# EAGLE board vcf-v2 (EAGLE 9.3.1)
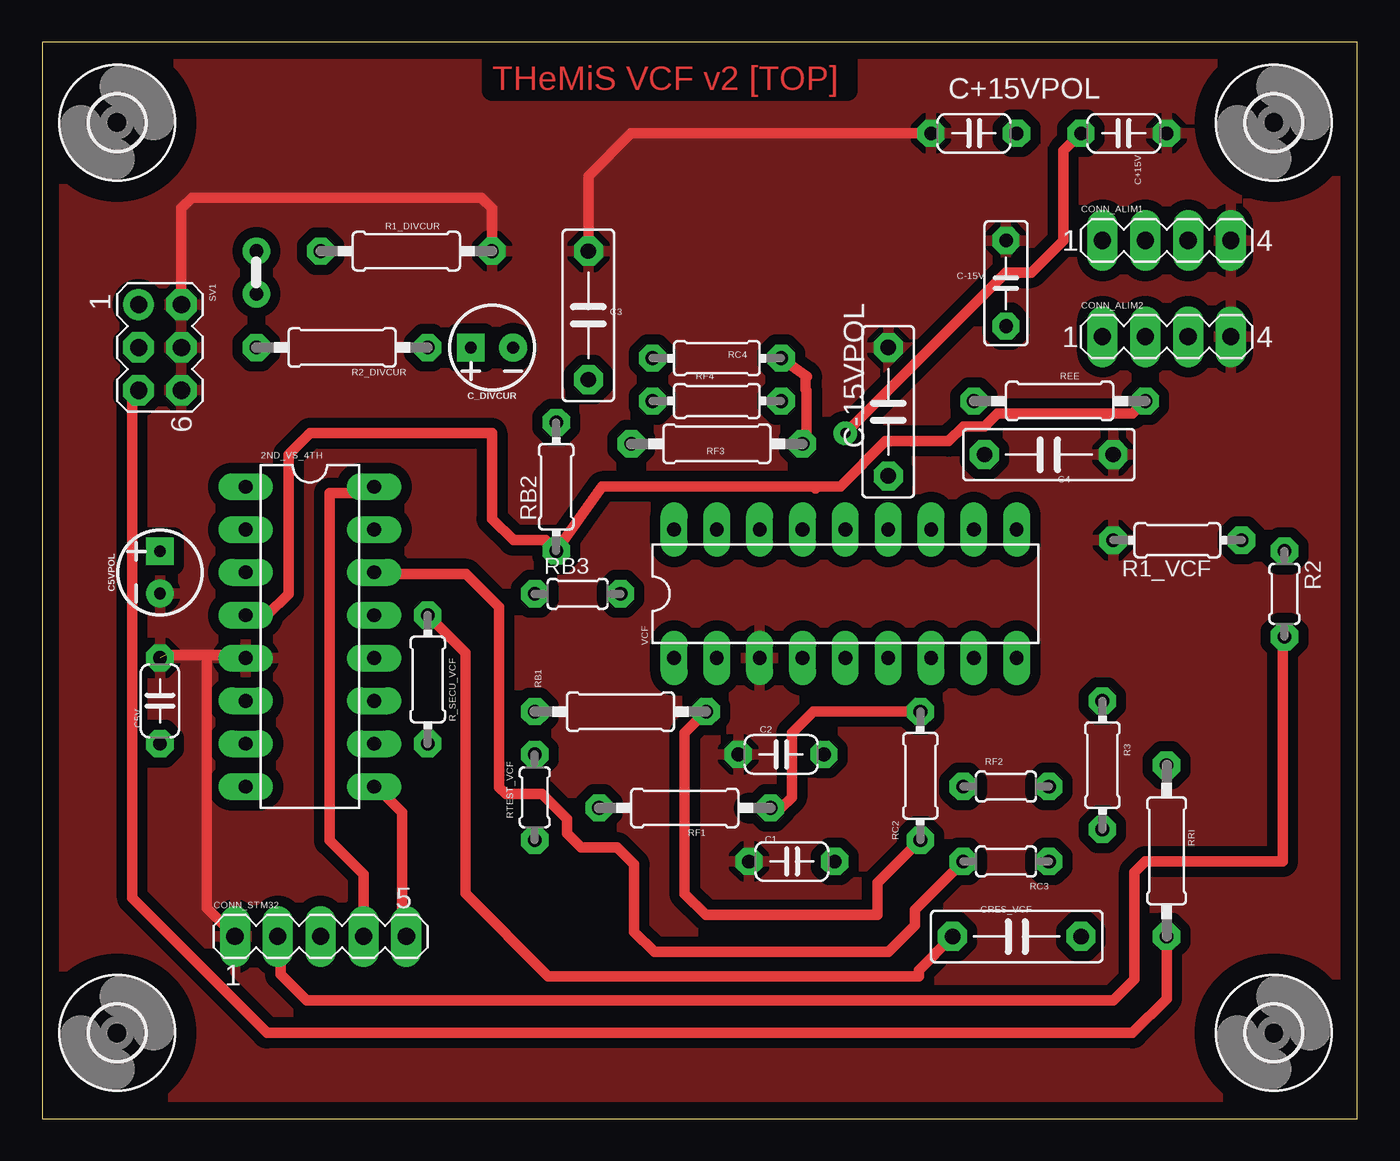
[diagram p0: board, top side]
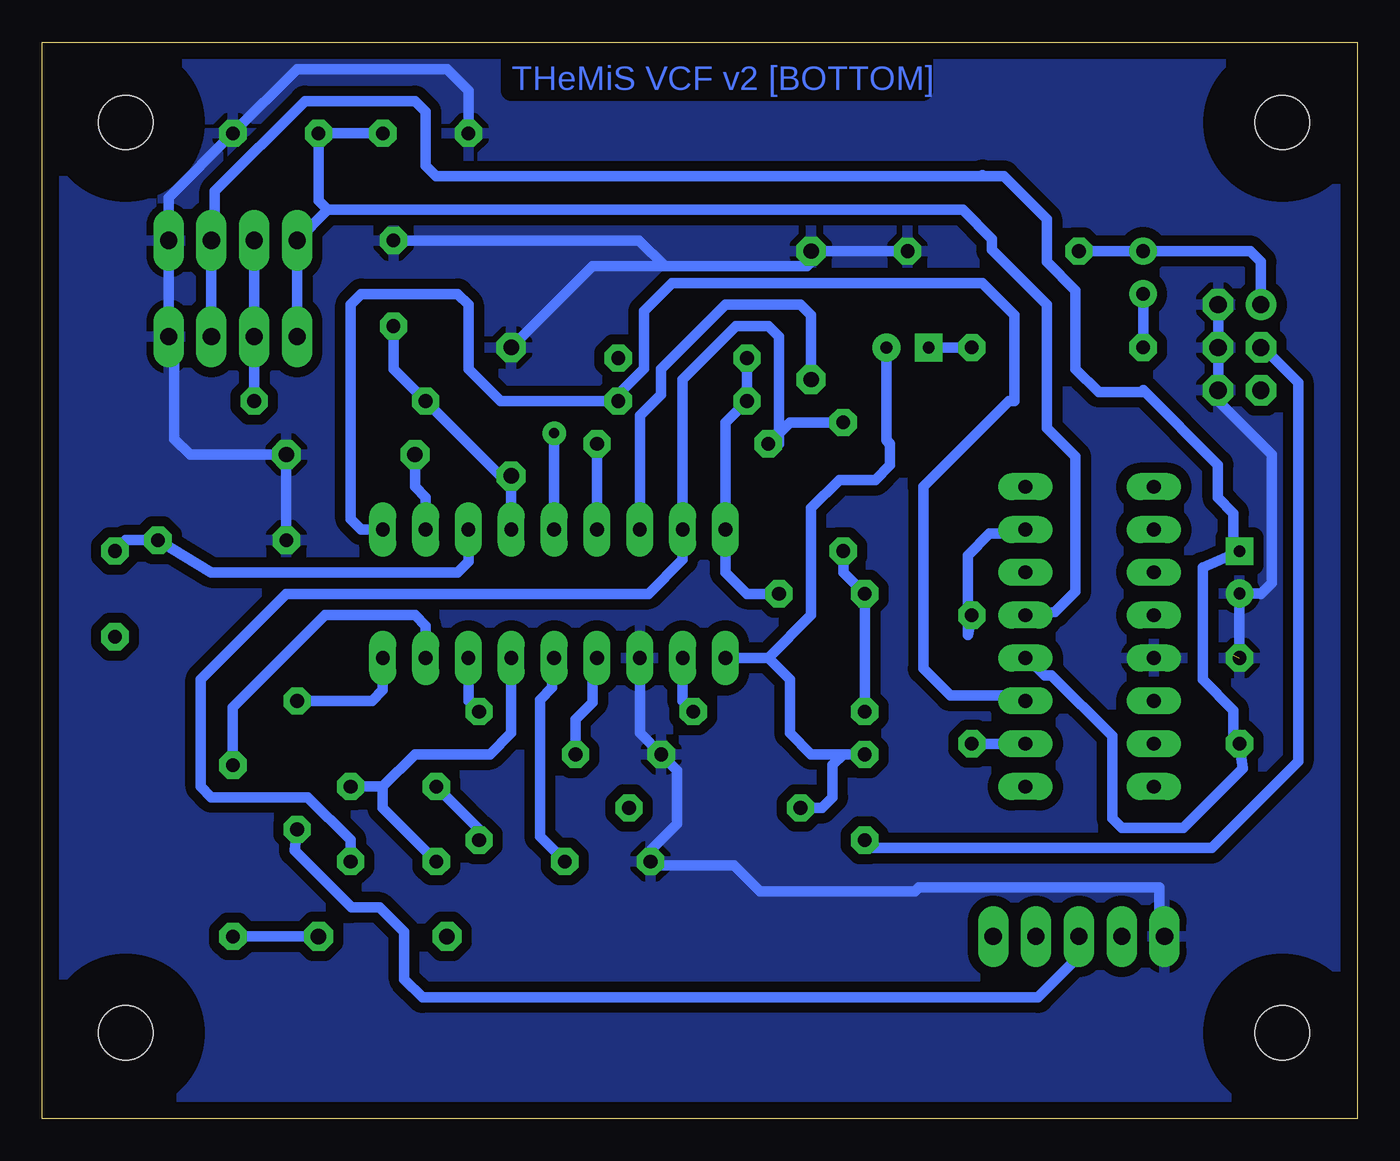
[diagram p1: board, bottom side, seen from below]

Size 77.98 x 63.82 mm. Coordinates in mm from the lower left corner, seen from the top.
Outline: 0,0 77.98,0 77.98,63.82 0,63.82 0,0
Copper layers (1*16): Top 0.035mm / dielectric 1.5mm / Bottom 0.035mm
Design rules "ENSEA_2019": minimum track width 0.4mm, minimum drill 0.6mm, track to track 0.4mm, track to pad 0.4mm, pad to pad 0.4mm, via to via 0.4mm, smd to smd 0.4mm, copper to edge 1mm, drill to drill 0.4mm, minimum pad ring 0.4mm, minimum via ring 0.4mm, stop-mask expansion 4mil, vias tented up to drill 0mil, thermal gap 0.4mm

## Footprints (pad centres in the part's own frame; a part is rotated, then mirrored left to right if it is on the bottom)
DIL16 = drill 0.813 long: 1 -8.89,-3.81; 2 -6.35,-3.81; 3 -3.81,-3.81; 4 -1.27,-3.81; 5 1.27,-3.81; 6 3.81,-3.81; 7 6.35,-3.81; 8 8.89,-3.81; 9 8.89,3.81; 10 6.35,3.81; 11 3.81,3.81; 12 1.27,3.81; 13 -1.27,3.81; 14 -3.81,3.81; 15 -6.35,3.81; 16 -8.89,3.81
C050-024X044 = drill 0.813 octagon: 1 -2.54,0; 2 2.54,0
C075-032X103 = drill 0.914 octagon: 1 -3.81,0; 2 3.81,0
CPOL-RADIAL-2.5MM-5MM-KIT = drill 0.7 pad 1.651 square: 1 1.25,0 | drill 0.7 pad 1.651: 2 -1.25,0
C050-025X075 = drill 0.813 octagon: 1 -2.54,0; 2 2.54,0
MA04-1 = drill 1.016 long: 1 -3.81,0; 2 -1.27,0; 3 1.27,0; 4 3.81,0
MA05-1 = drill 1.016 long: 1 -5.08,0; 2 -2.54,0; 3 0,0; 4 2.54,0; 5 5.08,0
JUMPER = drill 0.813: 1 -1.27,0; 2 1.27,0
0207/10 = drill 0.813 octagon: 1 -5.08,0; 2 5.08,0
0204/7 = drill 0.813 octagon: 1 -3.81,0; 2 3.81,0
0204/5 = drill 0.813 octagon: 1 -2.54,0; 2 2.54,0
MA03-2 = drill 1.016: 1 -2.54,-1.27 | drill 1.016 octagon: 2 -2.54,1.27; 3 0,-1.27; 4 0,1.27; 5 2.54,-1.27; 6 2.54,1.27
3,2 = hole 3.2: 0,0
DIL18 = drill 0.813 long: 1 -10.16,-3.81; 2 -7.62,-3.81; 3 -5.08,-3.81; 4 -2.54,-3.81; 5 0,-3.81; 6 2.54,-3.81; 7 5.08,-3.81; 8 7.62,-3.81; 9 10.16,-3.81; 10 10.16,3.81; 11 7.62,3.81; 12 5.08,3.81; 13 2.54,3.81; 14 0,3.81; 15 -2.54,3.81; 16 -5.08,3.81; 17 -7.62,3.81; 18 -10.16,3.81

## Placement (x,y rotation side)
2ND_VS_4TH  ADG411N  [DIL16]  15.88,28.58 270 top
C1  300p  [C050-024X044]  44.45,15.24 0 top
C2  300p  [C050-024X044]  43.81,21.59 0 top
C3  300p  [C075-032X103]  32.38,47.62 270 top
C4  300p  [C075-032X103]  59.69,39.37 180 top
C5V  100n  [C050-024X044]  6.99,24.77 90 top
C5VPOL  10uF  [CPOL-RADIAL-2.5MM-5MM-KIT]  6.99,32.38 90 top
C+15V  100n  [C050-024X044]  64.14,58.42 180 top
C+15VPOL  1u  [C050-024X044]  55.24,58.42 0 top
C-15V  100n  [C050-025X075]  57.15,49.53 90 top
C-15VPOL  1u  [C075-032X103]  50.16,41.91 90 top
C_DIVCUR  10uF  [CPOL-RADIAL-2.5MM-5MM-KIT]  26.67,45.72 180 top
CONN_ALIM1  [MA04-1]  66.68,52.07 0 top
CONN_ALIM2  [MA04-1]  66.68,46.35 0 top
CONN_STM32  [MA05-1]  16.51,10.79 0 top
CRES_VCF  1u  [C075-032X103]  57.78,10.79 0 top
JP_MIXER_OUT  JUMPER_WIRE  [JUMPER]  12.7,50.16 270 top
R1_DIVCUR  470  [0207/10]  21.59,51.43 0 top
R1_VCF  10k  [0204/7]  67.31,34.29 180 top
R2  100k  [0204/5]  73.66,31.12 270 top
R2_DIVCUR  470  [0207/10]  17.78,45.72 180 top
R3  100k  [0204/7]  62.87,20.95 270 top
R_SECU_VCF  1k  [0204/7]  22.86,26.03 270 top
RB1  220k  [0207/10]  34.29,24.13 0 top
RB2  220k  [0204/7]  30.48,37.46 90 top
RB3  220k  [0204/5]  31.75,31.12 0 top
RC2  91k  [0204/7]  52.07,20.32 90 top
RC3  91k  [0204/5]  57.15,15.24 180 top
RC4  91k  [0204/7]  40.01,45.09 0 top
REE  1.5k  [0207/10]  60.32,42.55 180 top
RF1  100k  [0207/10]  38.1,18.41 180 top
RF2  100k  [0204/5]  57.15,19.69 0 top
RF3  100k  [0207/10]  40.01,40 0 top
RF4  100k  [0204/7]  40.01,42.55 0 top
RRI  51k  [0207/10]  66.68,15.88 270 top
RTEST_VCF  91k  [0204/5]  29.21,19.05 90 top
SV1  [MA03-2]  6.99,45.72 270 top
U$1  [3,2]  4.45,59.05 0 top
U$2  [3,2]  73.03,59.05 0 top
U$3  [3,2]  73.03,5.08 0 top
U$4  [3,2]  4.45,5.08 0 top
VCF  AS3320  [DIL18]  47.62,31.12 0 top

## Library data of the parts
2ND_VS_4TH = analog-devices; MF: ALTERA CORPORATION; MPN: ADG411BN; OC_FARNELL: 1424317; OC_NEWARK: 05F6198
C1-C4 C5V C+15V C+15VPOL C-15V C-15VPOL CRES_VCF = rcl; SPICEPREFIX: C
C5VPOL C_DIVCUR = SparkFun-Capacitors; PROD_ID: CAP-08440
CONN_ALIM1 CONN_ALIM2 CONN_STM32 SV1 = con-lstb; OC_FARNELL: unknown; OC_NEWARK: unknown
JP_MIXER_OUT = 6P1_EVB
R1_DIVCUR R1_VCF R2 R2_DIVCUR R3 R_SECU_VCF RB1-RB3 RC2-RC4 REE RF1-RF4 RRI RTEST_VCF = rcl; SPICEPREFIX: R
U$1-U$4 = holes
VCF = analog-audio-chips

## Nets
5V: 2ND_VS_4TH.12 C5V.1 C5VPOL.1 CONN_ALIM1.3 CONN_ALIM2.3
+15V: 2ND_VS_4TH.13 C+15V.2 C+15VPOL.2 CONN_ALIM1.1 CONN_ALIM2.1 VCF.14
-15V: 2ND_VS_4TH.4 CONN_ALIM1.2 CONN_ALIM2.2 RB1.1 RB2.1 RB3.1 REE.1
AGND: 2ND_VS_4TH.5 C1.1 C2.1 C3.1 C4.1 C5V.2 C5VPOL.2 C+15V.1 C+15VPOL.1 C-15V.2 C-15VPOL.2 CONN_ALIM1.4 CONN_ALIM2.4 CONN_STM32.1 R1_DIVCUR.2 R1_VCF.2 SV1.2 SV1.4 SV1.6 VCF.3
CV_CUTOFF: CONN_STM32.2 R2.2
CV_RES: CONN_STM32.3 R3.2
I_IN: JP_MIXER_OUT.1 R1_DIVCUR.1 SV1.1
IN_2NDORDER: 2ND_VS_4TH.16 CONN_STM32.4
IN_4THORDER: 2ND_VS_4TH.9 CONN_STM32.5
N$5: C1.2 VCF.5
N$17: C3.2 VCF.16
N$18: C2.2 VCF.4
N$24: C4.2 VCF.11
N$37: R1_VCF.1 R2.1 VCF.12
N$57: RC2.2 RF1.1 VCF.7
N$58: 2ND_VS_4TH.15 CRES_VCF.1 R_SECU_VCF.1
N$62: RB1.2 RC2.1 RF2.1 VCF.2
N$65: 2ND_VS_4TH.14 RC3.2 RF2.2 VCF.6
N$69: 2ND_VS_4TH.11 RF4.2 VCF.10
N$72: RB2.2 RC3.1 RF3.1 VCF.17
N$73: 2ND_VS_4TH.10 R_SECU_VCF.2
N$75: C_DIVCUR.1 R2_DIVCUR.1
N$79: JP_MIXER_OUT.2 R2_DIVCUR.2
N$82: RC4.2 RF3.2 VCF.15
N$83: RB3.2 RC4.1 RF4.1 VCF.18
N$86: RRI.1 VCF.8
N$87: R3.1 VCF.9
OUT: CRES_VCF.2 RRI.2 SV1.5
V_IN: RTEST_VCF.1 SV1.3
VCF_IN: C_DIVCUR.2 RF1.2 RTEST_VCF.2 VCF.1
VM3320: C-15V.1 C-15VPOL.1 REE.2 VCF.13

## Tracks (layer width: path | path; a pad name or v marks a point on that pad's centre or on a via)
5V
  Bottom 0.61: 2ND_VS_4TH.12 19.34,27.08 18.54,26.28 18.14,26.28 14.54,22.68 14.54,17.81 13.98,17.24 10.3,17.24 6.79,20.76 C5V.1 7.34,22.28 7.34,24.21 9.18,26.05 9.18,32.68 C5VPOL.1 7.34,33.88 7.34,35.88 8.27,36.81 8.27,38.75 12.7,43.18 12.8,43.08 15.34,43.08 16.7,44.45 16.7,49.09 18.41,50.8 18.41,53.34 20.95,55.88 22.15,55.88 | CONN_ALIM2.3 CONN_ALIM1.3 67.74,52.28 67.74,54.98 62.4,60.32 55.88,60.32 55.24,59.69 55.24,56.52 54.61,55.88 22.15,55.88 | 22.15,55.88 22.22,55.95
+15V  (via drill 0.6)
  Top 0.61: v47.62,40.64 57.15,50.16 58.65,50.16 60.56,52.07 60.56,57.38 C+15V.2
  Bottom 0.61: 2ND_VS_4TH.13 17.93,30.02 16.7,31.24 16.7,39.24 18.41,40.95 18.41,48.26 21.67,51.52 21.67,52.15 23.4,53.88 61.05,53.88 | CONN_ALIM2.1 CONN_ALIM1.1 61.05,53.88 | VCF.14 v47.62,40.64 | C+15VPOL.2 C+15V.2 61.59,54.42 61.05,53.88
-15V
  Top 0.61: 12.14,29.88 2ND_VS_4TH.4 13.34,29.84 14.61,31.12 14.61,39.37 15.88,40.64 26.67,40.64 26.67,35.56 27.94,34.29 29.84,34.29 RB2.1 33.2,37.46 45.95,37.46 | 45.95,37.46 45.84,37.35 | 45.95,37.46 47.32,37.46 50.01,40.16 53.74,40.16 54.62,41.03 55.87,41.03 56.63,41.79 64.65,41.79 REE.1
  Bottom 0.61: RB2.1 30.48,32.38 RB3.1 RB1.1 | CONN_ALIM1.2 CONN_ALIM2.2 REE.1
AGND  (1 unrouted)
  Top 0.61: 7.34,27.48 9.74,27.48 | 9.74,27.48 11.74,27.48 2ND_VS_4TH.5 | 9.74,27.48 9.74,12.48 CONN_STM32.1 | R1_DIVCUR.2 26.67,53.98 26.04,54.61 8.89,54.61 8.25,53.98 SV1.2 | C3.1 32.38,55.88 34.92,58.42 C+15VPOL.1
  Bottom 0.61: CONN_STM32.1 11.74,11.11 11.74,13.71 26,13.71 26.24,13.47 35.42,13.47 36.96,15.01 41.68,15.01 C1.1 41.91,15.89 40.33,17.47 40.33,20.64 C2.1 42.55,22.86 VCF.3 | R1_DIVCUR.2 31.75,51.43 | 31.75,51.43 C3.1 | SV1.2 SV1.4 SV1.6 8.25,42.55 5.08,39.37 5.08,31.75 5.71,31.12 5.73,31.13 C5VPOL.2 C5V.2 | R1_VCF.2 C4.1 69.22,39.37 70.14,40.3 70.14,46.28 CONN_ALIM2.4 CONN_ALIM1.4 70.48,54.61 C+15V.1 62.87,62.23 53.98,62.23 52.7,60.96 C+15VPOL.1 | 56.52,52.07 C-15V.2 42.59,52.07 41.06,50.54 | 31.75,51.43 32.65,50.54 41.06,50.54 | C-15VPOL.2 45.34,50.54 41.06,50.54
  pour Bottom (isolate 0.61): 0,63.5 77.47,63.5 77.47,0 0,0
  pour Top (isolate 0.61): 0,63.5 78.11,63.5 78.11,0 0,0
CV_CUTOFF
  Top 0.61: CONN_STM32.2 14.14,10.62 14.14,8.54 15.67,7.01 63.52,7.01 64.77,8.25 64.77,14.61 65.41,15.24 67.95,15.24 68.58,15.24 73.55,15.24 73.55,28.47 R2.2
CV_RES
  Bottom 0.61: CONN_STM32.3 16.51,9.61 18.94,7.18 55.44,7.18 56.52,8.25 56.52,11.05 57.97,12.51 59.64,12.51 63.01,15.89 R3.2
I_IN
  Bottom 0.61: SV1.1 5.71,50.8 6.35,51.43 JP_MIXER_OUT.1 R1_DIVCUR.1
IN_2NDORDER
  Top 0.61: 2ND_VS_4TH.16 19.3,37.08 17.04,37.08 17.04,16.49 19.05,14.47 CONN_STM32.4
IN_4THORDER
  Top 0.61: 2ND_VS_4TH.9 19.81,19.69 21.34,18.16 21.34,11.01 CONN_STM32.5
N$5
  Bottom 0.61: C1.2 48.47,16.72 48.47,24.82 47.74,25.55 47.74,27.19 VCF.5
N$17
  Bottom 0.61: VCF.16 42.55,41.68 41.29,42.93 41.29,44.43 37.46,48.26 33.02,48.26 32.38,47.62 C3.2
N$18
  Bottom 0.61: C2.2 46.35,23.66 45.34,24.68 45.34,27.05 VCF.4
N$24
  Bottom 0.61: C4.2 55.88,37.46 55.24,36.83 VCF.11
N$37
  Bottom 0.61: R2.1 73.03,34.29 R1_VCF.1 67.95,32.38 53.34,32.38 52.7,33.02 VCF.12
N$57
  Top 0.61: 41.91,18.41 RF1.1 43.81,18.41 44.45,19.05 44.45,22.86 45.72,24.13 RC2.2
  Bottom 0.61: VCF.7 52.7,24.77 RC2.2
N$58
  Top 0.61: R_SECU_VCF.1 25.11,27.6 25.11,13.34 30,8.45 51.98,8.45 51.98,8.79 CRES_VCF.1
  Bottom 0.61: 2ND_VS_4TH.15 19.74,34.68 21.81,34.68 23.11,33.38 23.11,28.69 R_SECU_VCF.1
N$62
  Top 0.61: RB1.2 38.1,22.86 38.1,13.34 39.37,12.07 49.53,12.07 49.53,13.97 RC2.1
  Bottom 0.61: RF2.1 52.07,17.14 RC2.1 | VCF.2 40.01,24.77 RB1.2
N$65
  Top 0.61: 2ND_VS_4TH.14 19.74,32.28 25.15,32.28 27.11,30.33 27.11,19.64 27.5,19.25 29.65,19.25 31.11,17.78 31.11,16.91 31.95,16.07 34.09,16.07 35.1,15.06 35.1,11.08 36.3,9.88 50.16,9.88 51.75,11.47 51.75,12.38 RC3.2
  Bottom 0.61: VCF.6 50.16,22.86 51.44,21.59 55.88,21.59 57.78,19.69 | RF2.2 57.78,19.69 | RC3.2 57.78,18.41 57.78,19.69
N$69
  Bottom 0.61: 2ND_VS_4TH.11 19.74,25.08 24.14,25.08 25.74,26.68 25.74,37.46 20.66,42.55 20.32,42.55 20.32,47.62 22.22,49.53 40.64,49.53 42.3,47.87 42.3,44.46 43.81,42.95 RF4.2 50.8,42.55 52.7,44.45 52.7,48.26 53.34,48.89 59.05,48.89 59.69,48.26 59.69,35.56 59.05,34.92 VCF.10
N$72
  Bottom 0.61: 40.14,35.08 VCF.17 | VCF.17 40.01,33.15 42.03,31.12 63.5,31.12 68.58,26.03 68.58,19.69 67.95,19.05 62.23,19.05 59.69,16.51 RC3.1 | VCF.17 40.01,43.81 36.83,46.99 34.92,46.99 34.29,46.35 34.29,40 RF3.1 33.66,41.27 RB2.2
N$73
  Bottom 0.61: R_SECU_VCF.2 2ND_VS_4TH.10
N$75
  Bottom 0.61: C_DIVCUR.1 R2_DIVCUR.1
N$79
  Bottom 0.61: JP_MIXER_OUT.2 R2_DIVCUR.2
N$82
  Top 0.61: 45.34,43.99 45.25,44.05 | 45.25,44.05 RC4.2 | 45.25,44.05 45.25,43.24 45.33,43.17 45.33,40.25 RF3.2
  Bottom 0.61: VCF.15 RF3.2
N$83
  Bottom 0.61: 37.74,35.08 VCF.18 | VCF.18 37.46,32.38 36.2,31.12 RB3.2 | VCF.18 37.46,41.27 RF4.1 RC4.1
N$86
  Bottom 0.61: VCF.8 55.24,29.21 55.88,29.84 61.19,29.84 66.68,24.36 RRI.1
N$87
  Bottom 0.61: R3.1 58.42,24.77 57.78,25.4 VCF.9
OUT
  Top 0.61: SV1.5 5.34,42.8 5.34,13.07 13.34,5.08 64.64,5.08 66.68,7.11 RRI.2
  Bottom 0.61: RRI.2 CRES_VCF.2
V_IN
  Bottom 0.61: RTEST_VCF.1 28.74,16.05 8.63,16.05 3.5,21.17 3.5,43.64 5.34,45.48 SV1.3
VCF_IN
  Bottom 0.61: 27.74,45.48 C_DIVCUR.2 27.92,40.22 27.7,40 27.7,38.74 28.58,37.86 30.72,37.86 32.38,36.2 32.38,29.84 34.92,27.3 | 37.34,27.48 VCF.1 34.92,27.3 | RF1.2 31.75,18.41 31.11,19.05 31.11,20.95 30.48,21.59 RTEST_VCF.2 32.38,21.59 33.66,22.86 33.66,26.03 34.92,27.3
VM3320
  Bottom 0.61: VCF.13 C-15VPOL.1 50.8,38.1 REE.2 57.15,44.45 C-15V.1

## Text on the board
Top: THeMiS VCF v2 [TOP]
Bottom: THeMiS VCF v2 [BOTTOM]